# Altium PCB esp32_radio_pcb.PcbDoc
Units mil, origin at the board's own origin, x right, y up, seen from the top; angles counter-clockwise.
Board outline 3940.03 x 2580.03 mil, 2 copper layers (Top Layer, Bottom Layer); 18 components, 18 nets, 86 pads, 0 vias.
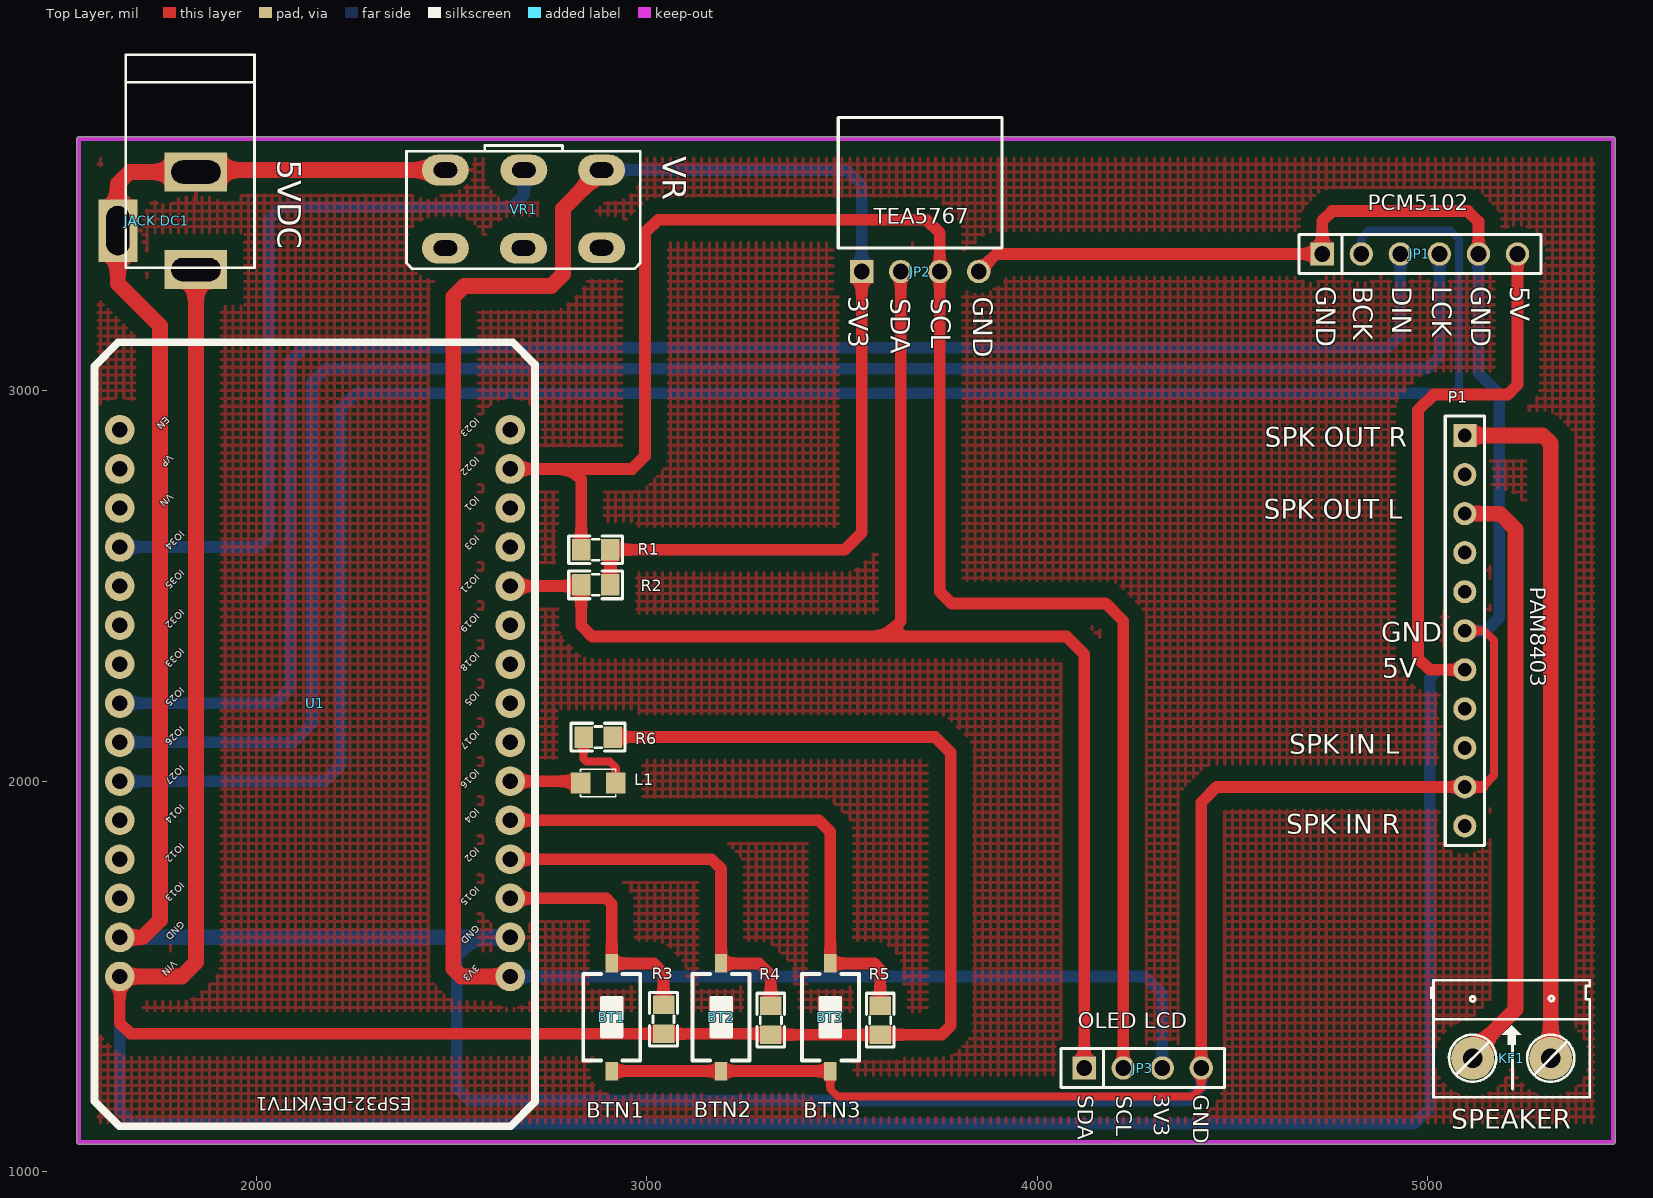
[diagram p0: Top Layer view]
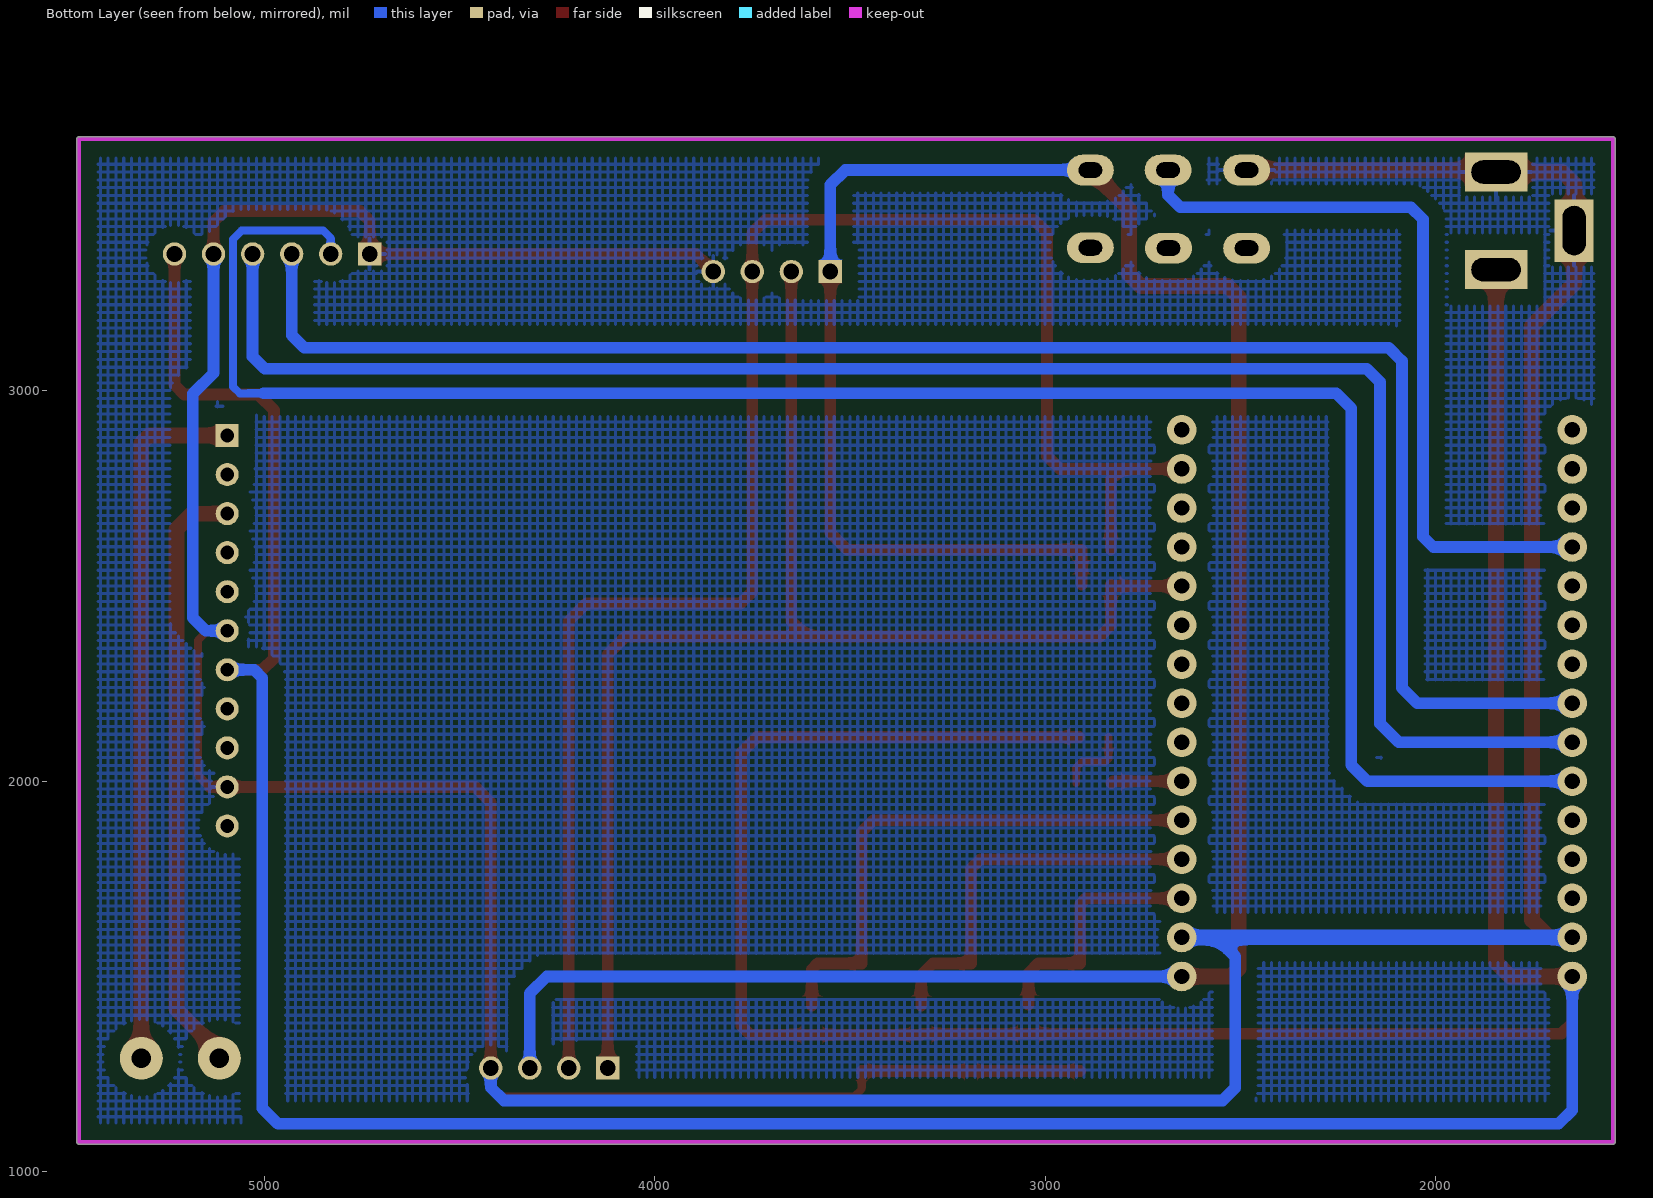
[diagram p1: Bottom Layer view, seen from below]
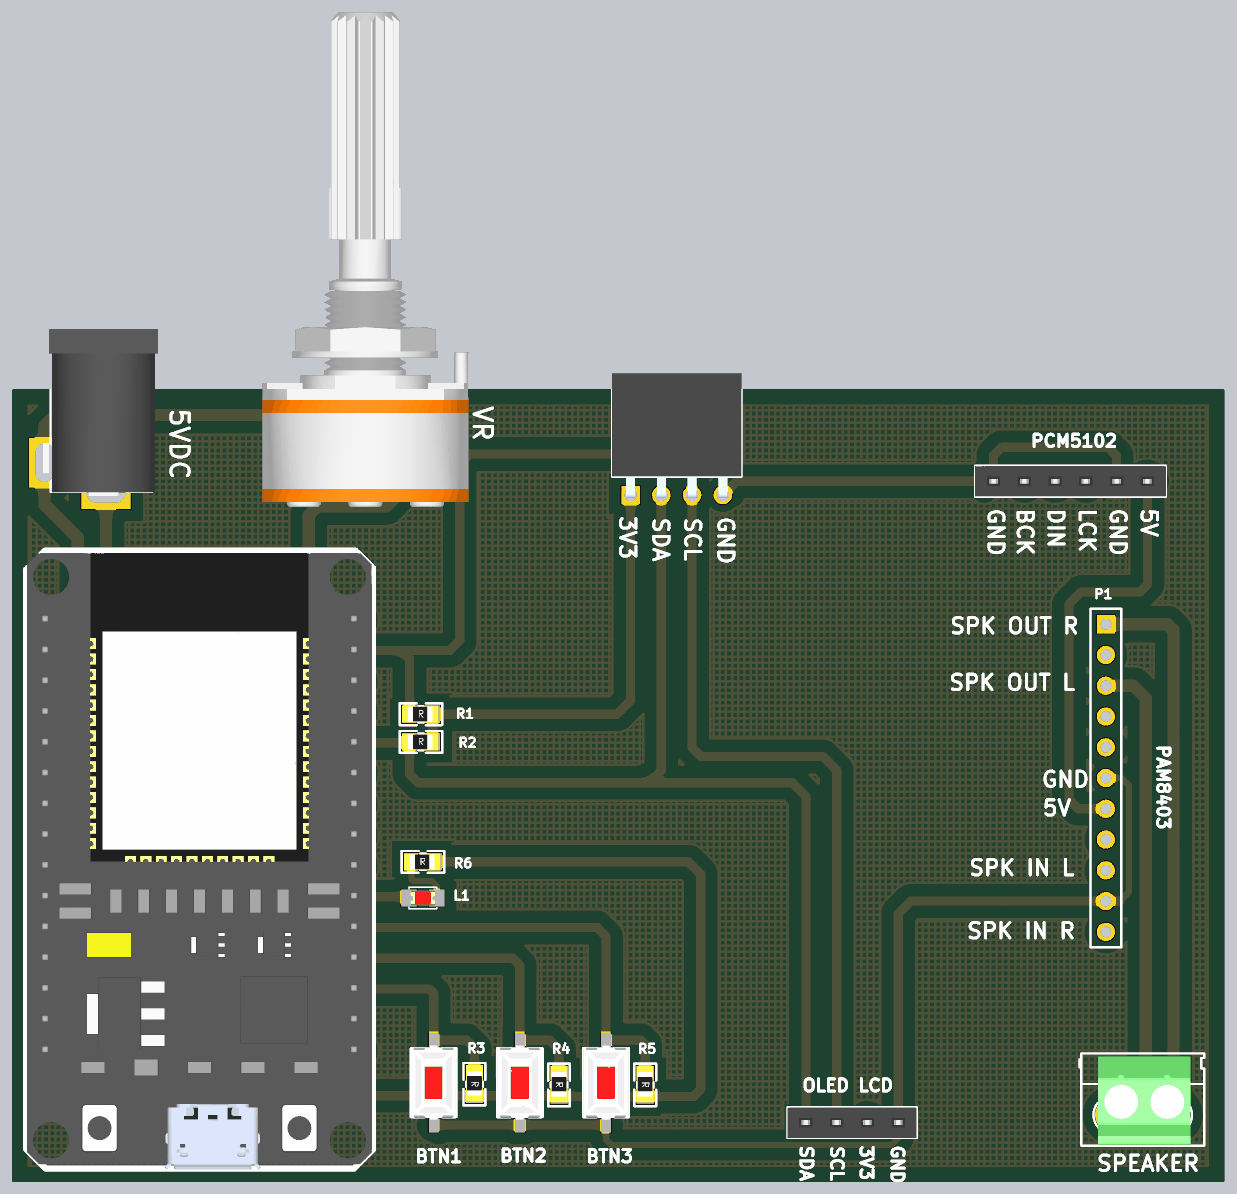
[diagram p2: 3D render of the assembled board from above, using the file's embedded part models]

## Layer stack, top to bottom
Top Solder: solder mask 0.4, Solder Resist, Dk 3.5
Top Layer: signal copper 1.4
Dielectric 1: dielectric 12.6, FR-4, Dk 4.8
Bottom Layer: signal copper 1.4
Bottom Solder: solder mask 0.4, Solder Resist, Dk 3.5

## Board outline
1539.98,1075 ccw(c1545,1075) 1545,1069.98 5475,1069.98 ccw(c5475,1075) 5480.02,1075 5480.02,3645 ccw(c5475,3645) 5472.5,3649.35 ccw(c5470,3645) 5470,3650.01 1545,3650.01 ccw(c1545,3645) 1539.98,3645

## Design rules (kind name [scope] priority, off if disabled: settings)
Clearance [All] p1: gap=40
PolygonConnect [All] p1: connectstyle=Relief reliefconductorwidth=10 reliefentries=4 polygonreliefangle="90 Angle" airgapwidth=10
RoutingVias [All] p1: holewidth=15 width=30 viastyle="Through Hole" minholewidth=15 minwidth=30 maxholewidth=15 maxwidth=30
SolderMaskExpansion [All] p1: expansion=4
Width [All] p1: maxlimit=40 minlimit=20 preferedwidth=30
30 further rules are at their usual default settings.

## Components (designator, comment, footprint, x,y, rotation, side; value= is the part's Value field where it differs from the comment)
BT1 "Nut Nhan 2 Chan SMD 3x6x2.5" "Nut Nhan 2 Chan SMD 3x6x2.5" 2910,1395 r90 top
BT2 "Nut Nhan 2 Chan SMD 3x6x2.5" "Nut Nhan 2 Chan SMD 3x6x2.5" 3190,1395 r90 top
BT3 "Nut Nhan 2 Chan SMD 3x6x2.5" "Nut Nhan 2 Chan SMD 3x6x2.5" 3470,1395 r90 top
"JACK DC1" "JACK DC 5.5" "JACK DC 5.5" 1745,3435 r270 top
JP1 "JP 1x6 2.54" "JP 1x6 CT" 4730,3350 r0 top
JP2 "JP 1x4 2.54" "JP 1x4 CC" 3700,3305 r0 top
JP3 "JP 1x4 2.54" "JP 1x4 CT" 4120,1265 r0 top
KF1 "CON 2 KF301" "Con 2 KF301 5.08" 5115,1290 r0 top
L1 "LED 0805" LED-0805-Red 2830,1995 r0 top
P1 "Header 11" HDR1X11 5095,2885 r270 top
R1 "1K" "tro smd 0805" 2868.83,2595 r0 top
R2 "1K" "tro smd 0805" 2868.83,2505 r0 top
R3 "10k" "tro smd 0805" 3045,1390 r270 top
R4 "10k" "tro smd 0805" 3320,1387.57 r270 top
R5 "10k" "tro smd 0805" 3600,1387.57 r270 top
R6 "10k" "tro smd 0805" 2875,2115 r0 top
U1 "ESP32-DEVKITC-32D" MODULE_ESP32-DEVKITV1 2150,2090 r180 top
VR1 "50K" VR-D1 2684,3565 r180 top

## Footprints (in the part's own frame and the unit in brackets; to place one, negate y for a bottom-side part, rotate by r counter-clockwise, add the part's x,y. Pads: shape width x height; smd on the part's side, far side on the other; paste and mask are expansions set on the pad)
"Con 2 KF301 5.08" [mil]
  round 110 hole 50: 1(0,0) 2(200,0)
  silkscreen extent -106,-100 300,200, body extent -45,-97 255,190, height 335
HDR1X11 [mm] "Connector; Header; 11 Position"
  rect 1.5x1.5 hole 0.9: 1(0,0)
  round 1.5 hole 0.9: 2(2.54,0) 3(5.08,0) 4(7.62,0) 5(10.16,0) 6(12.7,0) 7(15.24,0) 8(17.78,0) 9(20.32,0) 10(22.86,0) 11(25.4,0)
  silkscreen extent -1.27,-1.27 26.67,1.27
"JACK DC 5.5" [mil] "Jac DC input"
  rect 100x160 hole 59.06 slot 125.98 at 90 deg: 1(125,100) 2(-125,100)
  rect 160x100 hole 59.06 slot 125.98 at 0 deg: 3(25,-100)
  silkscreen extent -425,-80 120,250, body extent -410,-105 134,269, height 434
"JP 1x4 CC" [mm]
  rect 1.52x1.52 hole 1.02: 1(-3.81,0)
  round 1.52 hole 1.02: 2(-1.27,0) 3(1.27,0) 4(3.81,0)
  silkscreen extent -5.33,1.52 5.33,10.03, body extent -5.33,-0.25 5.33,10.05, height 2.51
"JP 1x4 CT" [mm]
  rect 1.52x1.52 hole 1.02: 1(0,0)
  round 1.52 hole 1.02: 2(2.54,0) 3(5.08,0) 4(7.62,0)
  silkscreen extent -1.52,-1.27 9.14,1.27, body extent -1.52,-1.25 9.14,1.25, height 8.51
"JP 1x6 CT" [mm] "6 row, straight, gold plating"
  rect 1.52x1.52 hole 1.02: 1(0,0)
  round 1.52 hole 1.02: 2(2.54,0) 3(5.08,0) 4(7.62,0) 5(10.16,0) 6(12.7,0)
  silkscreen extent -1.52,-1.27 14.22,1.27, body extent -1.52,-1.25 14.22,1.25, height 8.51
LED-0805-Red [mil]
  rect 50x55 smd: 1(0,0) 2(90,0)
  silkscreen extent 0,-35 90,35, body extent 5,-25 85,25, height 43
MODULE_ESP32-DEVKITV1 [mil]
  round 76 / inner round 60 / far side round 76 hole 39.37: 1(-500,590.55) 2(-500,490.55) 3(-500,390.55) 4(-500,290.55) 5(-500,190.55) 6(-500,90.55) 7(-500,-9.45) 8(-500,-109.45) 9(-500,-209.45) 10(-500,-309.45) 11(-500,-409.45) 12(-500,-509.45) 13(-500,-609.45) 14(-500,-709.45) 15(-500,-809.45) 16(500,-809.45) 17(500,-709.45) 18(500,-609.45) 19(500,-509.45) 20(500,-409.45) 21(500,-309.45) 22(500,-209.45) 23(500,-109.45) 24(500,-9.45) 25(500,90.55) 26(500,190.55) 27(500,290.55) 28(500,390.55) 29(500,490.55) 30(500,590.55)
  silkscreen extent -563,-1034 565,974, body extent -560,-1027 562,978, height 283
"Nut Nhan 2 Chan SMD 3x6x2.5" [mm] "Switch SMD type"
  rect 1.2x0.8 smd: 1(-3.5,0) 2(3.5,0)
  silkscreen extent -2.82,-1.85 2.82,1.85, body extent -3.05,-1.85 3.05,1.85, height 2.5
"tro smd 0805" [mm]
  rect 1.2x1.4 smd: 1(-0.946,-0.061) 2(0.954,-0.061)
  silkscreen extent -1.75,-0.97 1.75,0.84, body extent -1.56,-0.76 1.44,0.64, height 0.53
VR-D1 [mil] "Volume control Dual"
  oval 120x78.74 hole 40 slot 60 at 0 deg: 1(-200,0) 2(-1,0) 3(200,0) 4(-200,199) 5(0,200) 6(200,200)
  silkscreen extent -299,-63 300,253, body extent -339,-1309 331,299, height 835

## Part data
JP1: library part "JP 1x6 2.54 Cai Thang", "C?m"
JP2: library part "JP 1x4 2.54 Cai Cong", "C?m"
JP3: library part "JP 1x4 2.54 Cai Thang", "C?m"
KF1: "C?m"
L1: library part "LED 0805 Do", "Dán"
P1: "Header, 11-Pin"
R1 R2 R3 R4 R5 R6: library part "Tro 0805 1% 1k", "Dán"
U1: "Eval Board For Esp-Wroom-32"
VR1: library part VR-DP, "Volume control Dual"

## Nets (pads, with @x,y where several pads share a name; then routed paths per layer and width w, separated by ;. In a path a pad name is that pad's centre, name@x,y a point inside that pad or via, vN(x,y) a via of type N, cw(c..) or ccw(c..) an arc to the next point about the centre after c; other vN are vias at no path point)
+3V3: JP2.1 JP3.3 R1.2 R2.2 U1.1 VR1.1 | length 6690.8
  Top Layer w30: R2.2 R1.2 3506.61,2592.61 3550,2636 JP2.1
  Top Layer w40: U1.1 2524.55,1499.45 2504,1520 2504,3240 2532,3268 2755,3268 2785,3298 2785,3466 VR1.1
  Bottom Layer w30: U1.1 4276.55,1499.45 4320,1456 JP3.3 ; VR1.1 3512,3565 3550,3527 JP2.1
+5V: "JACK DC1.1" JP1.6 P1.7 R3.2 R4.2 R5.2 R6.2 U1.30 | length 12148.9
  Top Layer w30: U1.30 1650,1380 1677.57,1352.43 R3.2 3315.18,1352.43 R4.2 R5.2 3755,1350 3778,1373 3778,2073 3738.39,2112.61 R6.2 ; P1.7 5005,2285 4975,2315 4975,2950 5015,2990 5205,2990 5230,3015 JP1.6
  Top Layer w40: U1.30 1808.45,1499.45 1845,1536 1845,3310
  Bottom Layer w30: U1.30 1650,1157 1685,1122 4965,1122 5005,1162 5005,2264 5026,2285 P1.7
ANALOG: U1.19 VR1.2 | length 1948.7
  Bottom Layer w30: U1.19 2005.45,2599.45 2032,2626 2032,3439 2063,3470 2654,3470 2685,3501 VR1.2
BCK: JP1.2 U1.25 | length 5070
  Bottom Layer w20: JP1.2 4830,3391 4849,3410 5058,3410 5080,3388 5080,3010 5063,2993 5002,2993
  Bottom Layer w30: U1.25 2174.45,1999.45 2216,2041 2216,2955 2254,2993 5002,2993
BTN1: BT1.2 R3.1 U1.3 | length 641.5
  Top Layer w30: U1.3 2895.55,1699.45 2910,1685 BT1.2 3017.2,1532.8 3042.61,1507.39 R3.1
BTN2: BT2.2 R4.1 U1.4 | length 1010.1
  Top Layer w30: U1.4 3165.55,1799.45 3190,1775 BT2.2 3287.2,1532.8 3317.61,1502.39 R4.1
BTN3: BT3.2 R5.1 U1.5 | length 1396
  Top Layer w30: U1.5 3440.55,1899.45 3470,1870 BT3.2 3582.2,1532.8 3597.61,1517.39 R5.1
DIN: JP1.3 U1.23 | length 4368.7
  Bottom Layer w30: U1.23 2046.45,2199.45 2086,2239 2086,3076 2120,3110 4898,3110 4930,3142 JP1.3
GND: "JACK DC1.2" "JACK DC1.3" BT1.1 BT2.1 BT3.1 JP1.1 JP1.5 JP2.4 JP3.4 P1.6 P1.10 U1.2 U1.29 VR1.3 | length 12352.7
  Top Layer w20: BT3.1 3470,1211 3489,1192 4398,1192 4420,1214 JP3.4 ; P1.6 5145,2385 5170,2360 5170,2015 5140,1985
  Top Layer w30: BT1.1 BT2.1 BT3.1 ; JP2.4 3895,3350 JP1.1 4730,3435 4755,3460 5103,3460 5130,3433 JP1.5 ; JP3.4 4420,1945 4460,1985 P1.10 5140,1985
  Top Layer w40: U1.29 1708.45,1599.45 1753,1644 1753,3166 1645,3274 1645,3410 1645,3530 1675,3560 1845,3560 1850,3565 VR1.3
  Bottom Layer w30: 2562,1599.45 2513,1550.45 2513,1214 2545,1182 4387,1182 4420,1215 JP3.4 ; P1.6 5150,2385 5183,2418 5183,2992 5130,3045 JP1.5
  Bottom Layer w40: U1.29 2562,1599.45 U1.2
LCK: JP1.4 U1.24 | length 4564.6
  Bottom Layer w30: U1.24 2094.45,2099.45 2142,2147 2142,3022 2176,3056 4999,3056 5030,3087 JP1.4
LED1: L1.1 U1.6 | length 181.8
  Top Layer w30: U1.6 2825.55,1999.45 L1.1
NetL1_2: L1.2 R6.1 | length 186.8
  Top Layer w20: R6.1 2837.77,2057.23 2845,2050 2905,2050 2920,2035 L1.2
SCL: JP2.3 JP3.2 R1.1 U1.14 | length 4496.4
  Top Layer w30: U1.14 2805.55,2799.45 ; R1.1 2831.61,2773.39 2805.55,2799.45 ; JP3.2 4220,2410 4175,2455 3780,2455 3750,2485 JP2.3 3750,3404 3716,3438 3029,3438 2995,3404 2995,2832 2962.45,2799.45 2805.55,2799.45
SDA: JP2.2 JP3.1 R2.1 U1.11 | length 3617.5
  Top Layer w30: U1.11 2828.45,2499.45 R2.1 2831.61,2398.39 2860,2370 3610,2370 ; JP2.2 3650,2410 3610,2370 ; JP3.1 4120,2325 4075,2370 3610,2370
SPK_IN_L: P1.9
SPK_IN_R: P1.11
SPK_OUT_L: KF1.1 P1.3 | length 1547.1
  Top Layer w40: P1.3 5185,2685 5225,2645 5225,1415 5115,1305 KF1.1
SPK_OUT_R: KF1.2 P1.1 | length 1803.3
  Top Layer w40: P1.1 5295,2885 5315,2865 KF1.2
pads on no net: P1.2 P1.4 P1.5 P1.8 U1.7 U1.8 U1.9 U1.10 U1.12 U1.13 U1.15 U1.16 U1.17 U1.18 U1.20 U1.21 U1.22 U1.26 U1.27 U1.28 VR1.4 VR1.5 VR1.6

## Polygon pours and split planes (outlines as drawn)
GND on Top Layer "Top Overlay-No Net" (hatched 90Degree grid 20 track 8, pour order 0): 1545,3645 5470,3645 5470,1080 5475,1075 1545,1075
GND on Bottom Layer "Top Overlay-No Net" (hatched 90Degree grid 20 track 8, pour order 2): 1545,3645 5475,3645 5475,1075 1545,1075

## Keep-outs
Keep-Out Layer:
  lines w10: 5470,3645 1545,3645 1545,1075 5475,1075 5475,3645

## Silkscreen, mask and mechanical layers (free items; w line width, h text height)
Top Overlay:
  text "VR" at 3041,3600 h60 r270
  text "5VDC" at 2055,3592 h60 r270
  text "PCM5102" at 4846,3462 h40
  text "TEA5767" at 3581,3427 h40
  text "GND" at 4714,3267 h50 r270
  text "BCK" at 4809,3267 h50 r270
  text "DIN" at 4909,3267 h50 r270
  text "LCK" at 5011,3267 h50 r270
  text "GND" at 5111,3267 h50 r270
  text "5V" at 5212,3267 h50 r270
  text "3V3" at 3517,3242 h50 r270
  text "GND" at 3836,3240 h50 r270
  text "SDA" at 3625,3237 h50 r270
  text "SCL" at 3728,3237 h50 r270
  text "SPK OUT R" at 4583,2856 h50
  text "SPK OUT L" at 4580,2672 h50
  text "PAM8403" at 5263,2498 h40 r270
  text "GND" at 4881,2357 h50
  text "5V" at 4884,2264 h50
  text "SPK IN L" at 4645,2070 h50
  text "SPK IN R" at 4638,1865 h50
  text "OLED LCD" at 4103,1367 h40
  text "3V3" at 4298,1196 h40 r270
  text "GND" at 4399,1196 h40 r270
  text "SDA" at 4103,1195 h40 r270
  text "SCL" at 4202,1194 h40 r270
  text "BTN2" at 3120,1139 h40
  text "BTN1" at 2845,1137 h40
  text "BTN3" at 3400,1137 h40
  text "SPEAKER" at 5060,1109 h50

## Text inside footprints (layer, text, board x,y; h text height)
U1: Top Overlay "ESP32-DEVKITV1" at 2397.64,1201.42 h60 r180; Top Overlay "3V3" at 2556.69,1536.45 h30 r225; Top Overlay "GND" at 2556.69,1636.45 h30 r225; Top Overlay "IO15" at 2556.69,1736.45 h30 r225; Top Overlay "IO2" at 2556.69,1836.45 h30 r225; Top Overlay "IO4" at 2556.69,1936.45 h30 r225; Top Overlay "IO16" at 2556.69,2036.45 h30 r225; Top Overlay "IO17" at 2556.69,2136.45 h30 r225; Top Overlay "IO5" at 2556.69,2236.45 h30 r225; Top Overlay "IO18" at 2556.69,2336.45 h30 r225; Top Overlay "IO19" at 2556.69,2436.45 h30 r225; Top Overlay "IO21" at 2556.69,2536.45 h30 r225; Top Overlay "IO3" at 2556.69,2636.45 h30 r225; Top Overlay "IO1" at 2556.69,2736.45 h30 r225; Top Overlay "IO22" at 2556.69,2836.45 h30 r225; Top Overlay "IO23" at 2556.69,2936.45 h30 r225; Top Overlay "VIN" at 1781.1,1546.69 h30 r225; Top Overlay "GND" at 1800.4,1647.09 h30 r225; Top Overlay "IO13" at 1800.4,1747.09 h30 r225; Top Overlay "IO12" at 1800.4,1847.09 h30 r225; Top Overlay "IO14" at 1800.4,1947.09 h30 r225; Top Overlay "IO27" at 1800.4,2047.09 h30 r225; Top Overlay "IO26" at 1800.4,2147.09 h30 r225; Top Overlay "IO25" at 1800.4,2247.09 h30 r225; Top Overlay "IO33" at 1800.4,2347.09 h30 r225; Top Overlay "IO32" at 1800.4,2447.09 h30 r225; Top Overlay "IO35" at 1800.4,2547.09 h30 r225; Top Overlay "IO34" at 1800.4,2647.09 h30 r225; Top Overlay "VN" at 1772.05,2742.75 h30 r225; Top Overlay "VP" at 1772.05,2842.75 h30 r225; Top Overlay "EN" at 1762.2,2940 h30 r225